# Altium PCB Power_9812282.PcbDoc
Units mm, origin at the board's own origin, x right, y up, seen from the top; angles counter-clockwise.
Board outline 64.01 x 76.07 mm, 2 copper layers (Top Layer, Bottom Layer); 36 components, 39 nets, 161 pads, 10 vias.
Unrouted connection lines stored in the file: 1.
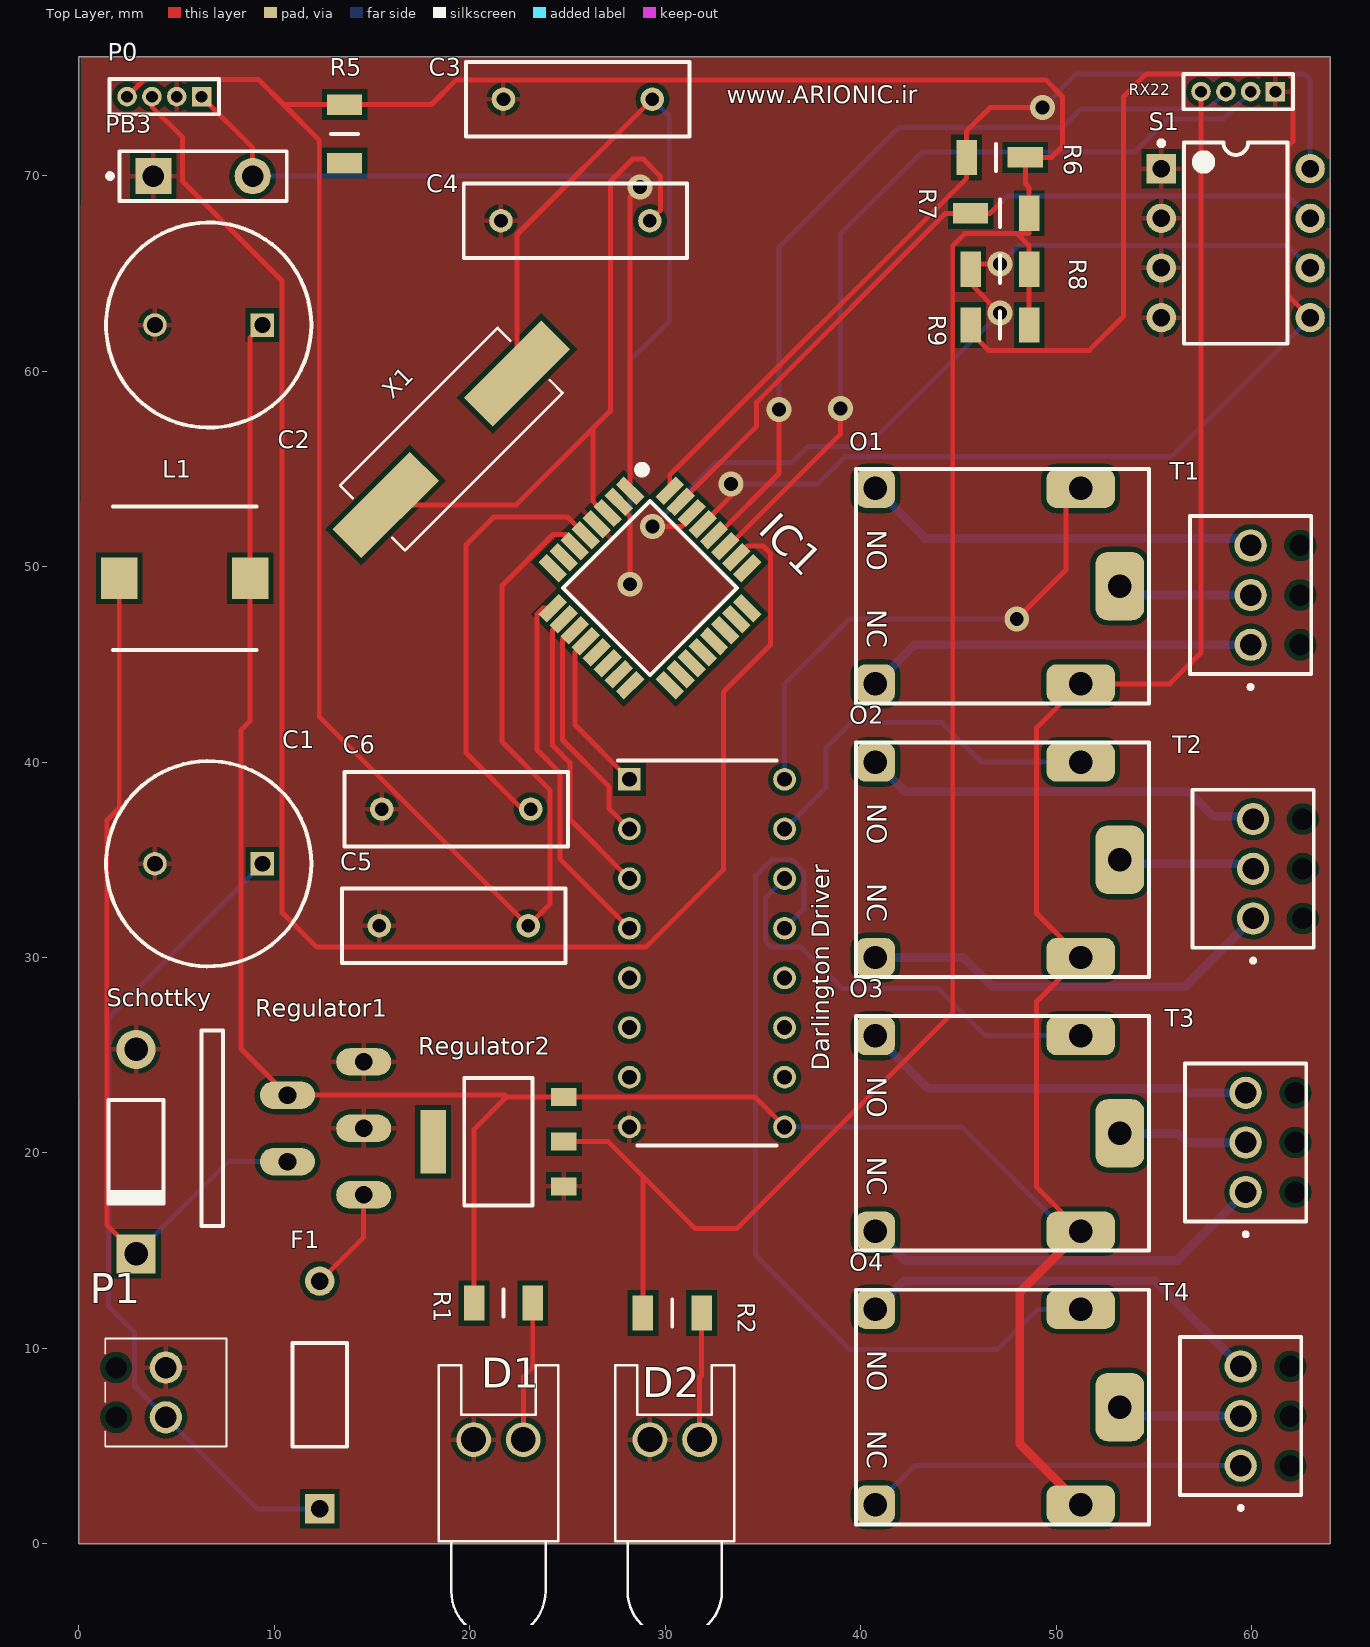
[diagram p0: Top Layer view]
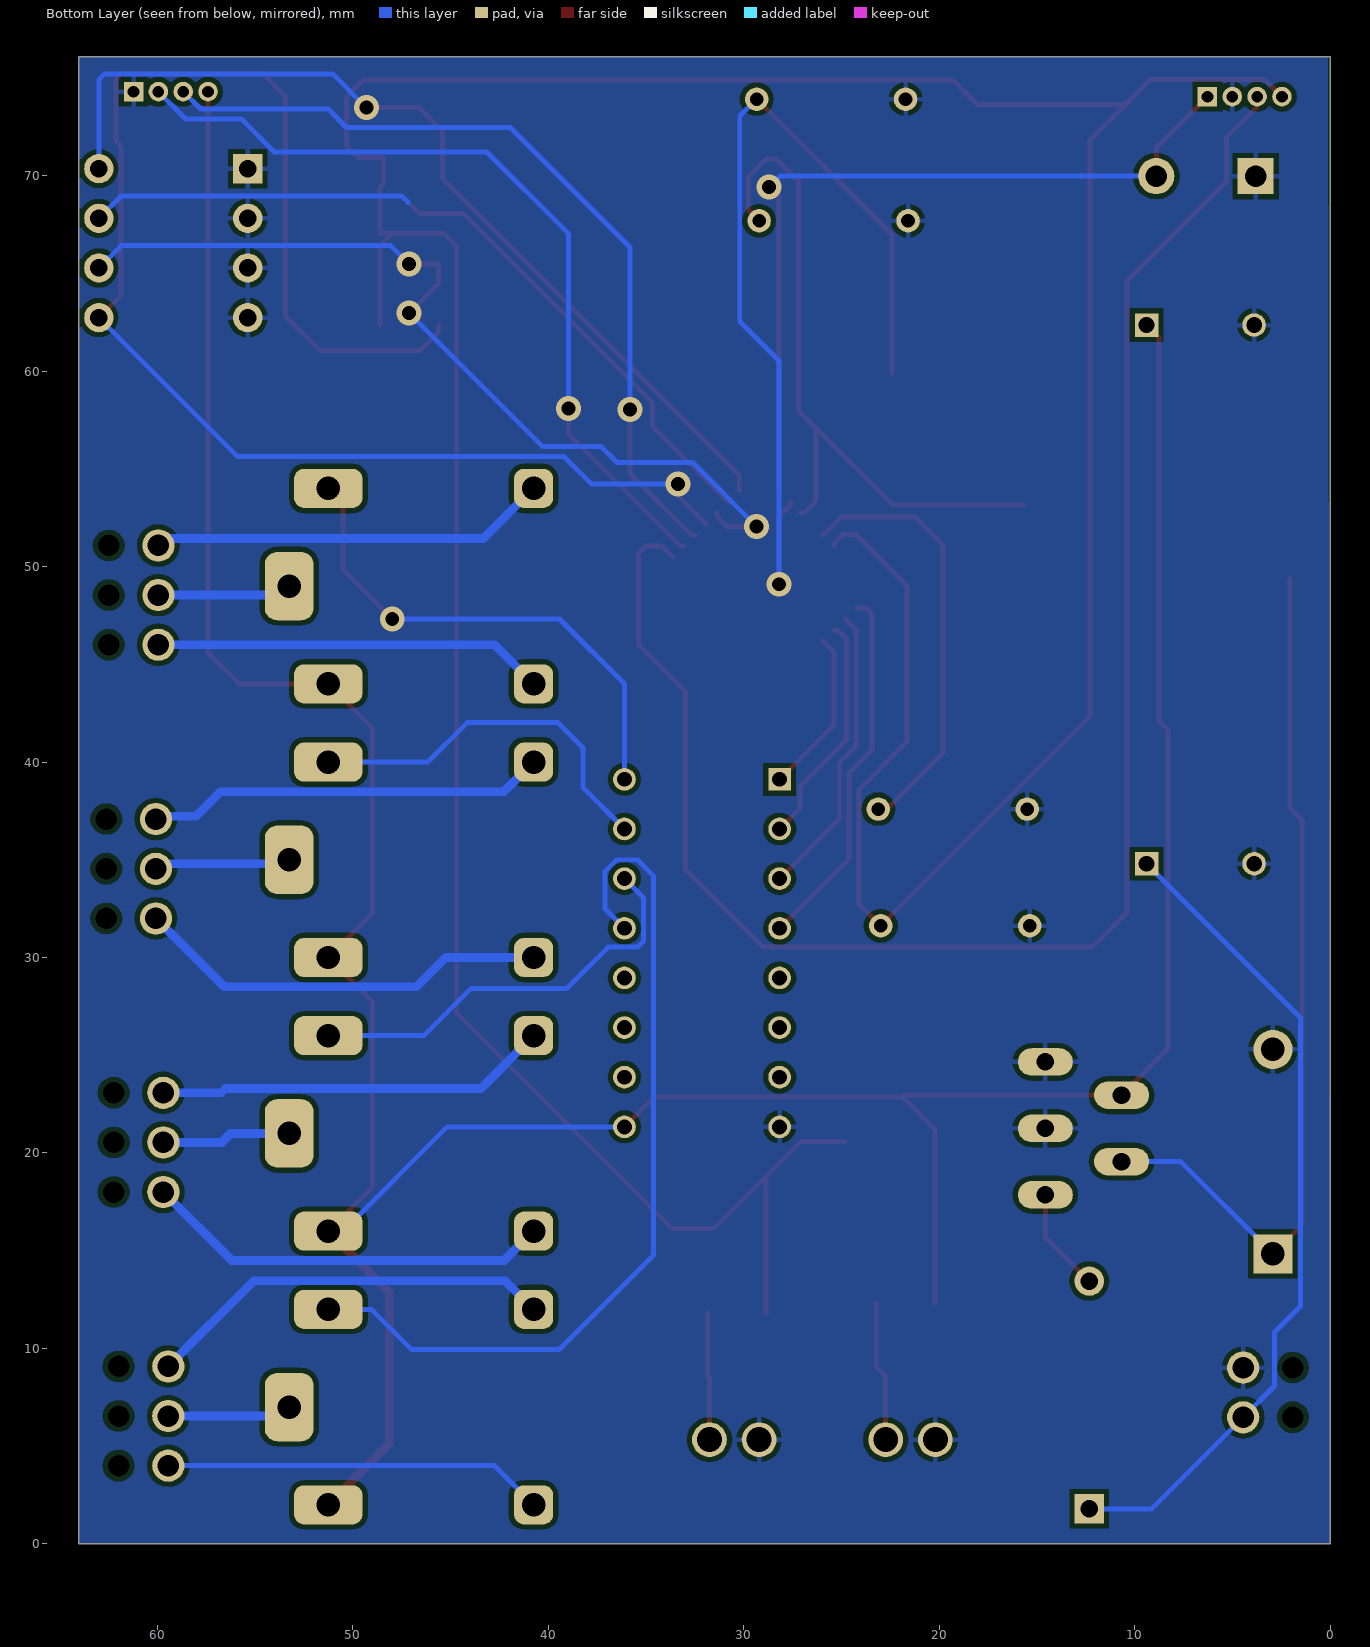
[diagram p1: Bottom Layer view, seen from below]
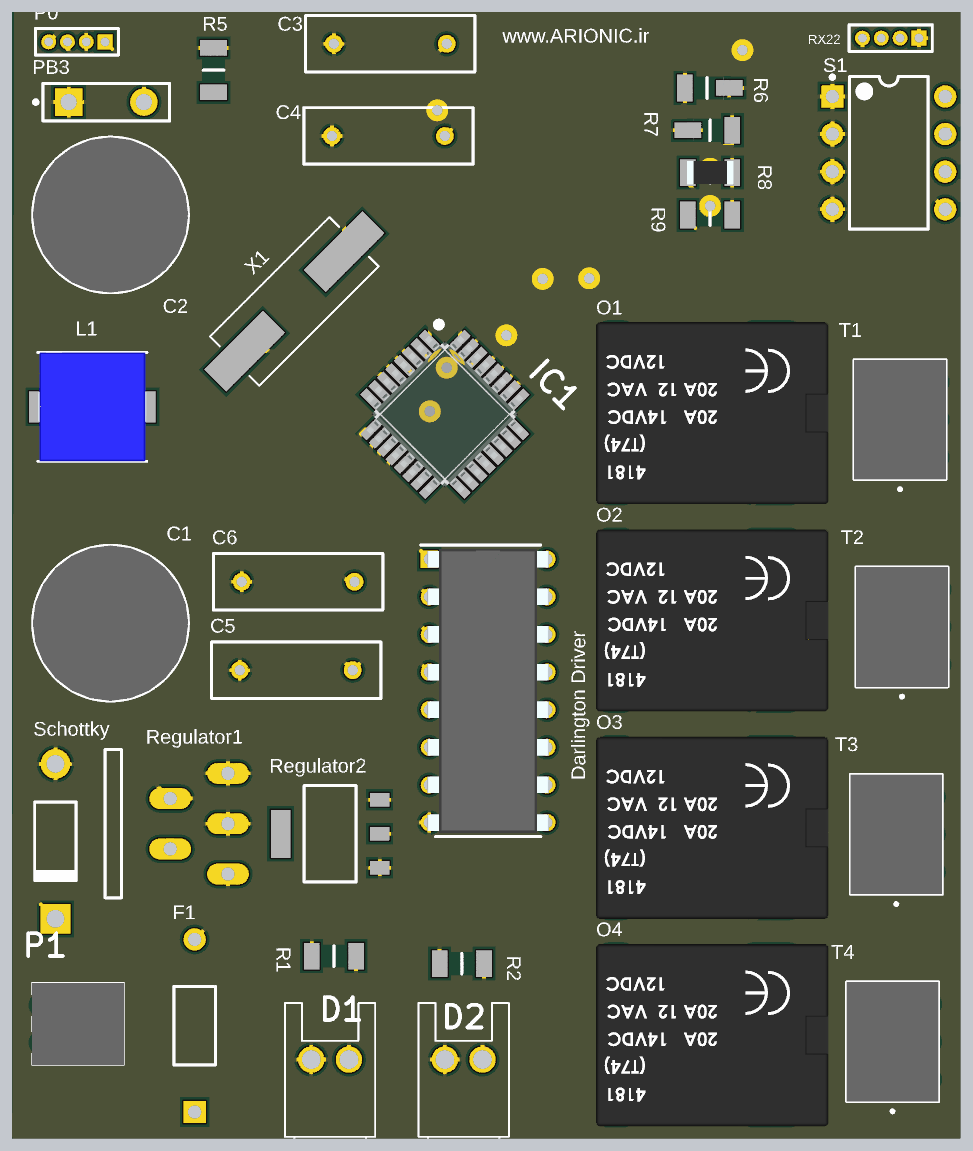
[diagram p2: 3D render of the assembled board from above, using the file's embedded part models]

## Layer stack, top to bottom
Top Solder: solder mask 0.0102, Solder Resist, Dk 3.5
Top Layer: signal copper 0.0356
Dielectric 1: dielectric 0.32, FR-4, Dk 4.8
Bottom Layer: signal copper 0.0356
Bottom Solder: solder mask 0.0102, Solder Resist, Dk 3.5

## Board outline
0,76.073 64.008,76.073 64.008,0 0,0
cut-out: 42.291,94.361

## Design rules (kind name [scope] priority, off if disabled: settings)
Clearance Clearance_1 [All] p1: gap=0.254 ignorepadtopadclearanceinfootprint=FALSE except(0: Arc-Hole Track-Hole SMDPad-Hole THPad-Hole Via-Hole Fill-Hole Poly-Hole Region-Hole Text-Hole)
Clearance [All] p2: gap=0.3 ignorepadtopadclearanceinfootprint=FALSE
PolygonConnect [All] p1: connectstyle=Relief reliefconductorwidth=0.254 reliefentries=4 polygonreliefangle="90 Angle" airgapwidth=0.254
RoutingVias [All] p1: holewidth=0.711 width=1.27 viastyle="Through Hole" minholewidth=0.711 minwidth=1.27 maxholewidth=0.711 maxwidth=1.27
SolderMaskExpansion [All] p1: expansion=0.102
Width Width_Relay_01 [InNet('NetO1_NC')] p1: maxlimit=0.45 minlimit=0.35 preferedwidth=0.4
Width [All] p2: maxlimit=0.254 minlimit=0.254 preferedwidth=0.254
30 further rules are at their usual default settings.

## Components (designator, comment, footprint, x,y, rotation, side; value= is the part's Value field where it differs from the comment)
C1 "100uF" CAPPRD550W60D1050H2150 9.388,34.798 r180 top
C2 "1000uF" CAPPRD550W60D1050H2150 9.388,62.357 r180 top
C3 "Cap" RAD-0.3 25.527,73.914 r0 top value=20pF
C4 "Cap" RAD-0.3 25.4,67.691 r0 top value=20pF
C5 "Cap" RAD-0.3 19.177,31.623 r180 top value=10pF
C6 "Cap" RAD-0.3 19.304,37.592 r180 top
D1 "LED0" LED-0 21.463,5.334 r0 top
D2 "LED0" LED-0 30.48,5.334 r0 top
"Darlington Driver" "ULN2003A" DIP794W56P254L1918H533Q16N 32.131,30.226 r0 top
F1 "Fuse 1" PIN-W2/E2.8 12.319,7.62 r90 top
IC1 "STM8S903K3T6C" QFP80P900X900X160-32N 29.21,48.895 r315 top
L1 "B82472P6152M000" INDPM7474X450N 5.413,49.403 r0 top
O1 "12V SMALL" Relay_5_Small 47,49 r270 top
O2 "12V SMALL" Relay_5_Small 47,35 r270 top
O3 "12V SMALL" Relay_5_Small 47,21 r270 top
O4 "12V SMALL" Relay_5_Small 47,7 r270 top
P0 "MHDR1X4" MHDR1X4 6.272,74.041 r180 top
P1 "INPUT_24V" 1725656 1.345,7.747 r270 top
PB3 "SW-PB" SPST-2 6.35,69.977 r0 top
R1 "1K" RESC3216X60N#1 21.717,12.319 r0 top
R2 "1k" RESC3216X60N#1 30.353,11.811 r0 top
R5 "CRCW120610M0FKEA" RESC3216X60N#1 13.589,72.136 r270 top
R6 "CRCW120610M0FKEA" RESC3216X60N#2 46.915,70.931 r0 top
R7 "CRCW120610M0FKEA" RESC3216X60N#3 47.117,68.073 r0 top
R8 "CRCW120610M0FKEA" RESC3216X60N#1 47.117,65.215 r0 top
R9 "CRCW120610M0FKEA" RESC3216X60N#1 47.117,62.357 r0 top
Regulator1 "LM2576" TO220-5 6.168,21.258 r90 top
Regulator2 "AMS1117-3.3" SOT229P700X180-4N 21.463,20.574 r90 top
RX22 "MHDR1X4" MHDR1X4 61.214,74.295 r180 top
S1 "SW-DIP4" DIP-8 59.182,66.548 r0 top
Schottky "1N5822" DO-41 2.921,20.066 r270 top
T1 "1725669" 1725669 59.944,46 r90 top
T2 "1725669" 1725669 60.071,32 r90 top
T3 "1725669" 1725669 59.69,18 r90 top
T4 "1725669" 1725669 59.436,4 r90 top
X1 "8.000MHZ" XTAL_ABLS-8.000MHZ-B2-T 19.05,56.515 r45 top

## Footprints (in the part's own frame and the unit in brackets; to place one, negate y for a bottom-side part, rotate by r counter-clockwise, add the part's x,y. Pads: shape width x height; smd on the part's side, far side on the other; paste and mask are expansions set on the pad)
1725656 [mm]
  round 1.65 hole 1.1: 1(-1.27,3.1) 2(1.27,3.1)
  round 0.55 hole 1.1 unplated: 3(-1.27,0.56) 4(1.27,0.56)
  silkscreen extent -2.77,0 2.77,6.2, body extent -2.77,0 2.77,6.2, height 8
1725669 [mm]
  round 1.65 hole 1.1: 1(0,0) 2(2.54,0) 3(5.08,0)
  round 0.55 hole 1.1 unplated: 4(0,-2.54) 5(2.54,-2.54) 6(5.08,-2.54)
  silkscreen extent -2.26,-3.1 6.58,3.1, body extent -1.5,-3.1 6.58,3.1, height 8.5
CAPPRD550W60D1050H2150 [mm]
  rect 1.2x1.2 hole 0.8: 1(0,0)
  round 1.2 hole 0.8: 2(5.5,0)
  silkscreen extent -2.5,-5.25 8,5.25, body extent -2.5,-5.25 8,5.25, height 21.5
DIP794W56P254L1918H533Q16N [mm]
  rect 1.16x1.16 hole 0.76: 1(-3.97,8.89)
  round 1.16 hole 0.76: 2(-3.97,6.35) 3(-3.97,3.81) 4(-3.97,1.27) 5(-3.97,-1.27) 6(-3.97,-3.81) 7(-3.97,-6.35) 8(-3.97,-8.89) 9(3.97,-8.89) 10(3.97,-6.35) 11(3.97,-3.81) 12(3.97,-1.27) 13(3.97,1.27) 14(3.97,3.81) 15(3.97,6.35) 16(3.97,8.89)
  silkscreen extent -4.55,-9.84 3.55,9.84, body extent -4.11,-9.59 4.11,9.59, height 5.33
DIP-8 [mm] "DIP; 8 Leads; Row Spacing 7.62 mm; Pitch 2.54 mm"
  rect 1.5x1.5 hole 0.9: 1(-3.81,3.81)
  round 1.5 hole 0.9: 2(-3.81,1.27) 3(-3.81,-1.27) 4(-3.81,-3.81) 5(3.81,-3.81) 6(3.81,-1.27) 7(3.81,1.27) 8(3.81,3.81)
  silkscreen extent -3.93,-5.15 2.65,5.23, body extent -3.6,-5.15 3.6,5.15, height 5.08
DO-41 [mm] "Diode, Axial; Body 5.2 x 2.7 mm (LxDia. max), Lead Dia. 0.86 mm (max)"
  round 2 hole 1.2: 1(-5.23,0)
  rect 2x2 hole 1.2: 2(5.23,0)
  silkscreen extent -2.65,-1.4 2.75,1.4
INDPM7474X450N [mm]
  rect 1.85x2.1 smd: 1(-3.35,0) 2(3.35,0)
  silkscreen extent -3.67,-3.67 3.68,3.68, body extent -3.67,-3.67 3.67,3.67, height 4.5
LED-0 [mil] "LED; 2 Leads"
  round 70 hole 50: 1(50,0) 2(-50,0)
  silkscreen extent -120,-400 120,150
MHDR1X4 [mm] "Connector; Header; 4 Position"
  rect 1x1 hole 0.6: 1(0,0)
  round 1 hole 0.6: 2(1.27,0) 3(2.54,0) 4(3.81,0)
  silkscreen extent -0.9,-0.9 4.71,0.9
PIN-W2/E2.8 [mm] "Thru-Hole; 2 Leads"
  rect 1.5x1.5 hole 0.9: 1(-5.825,0)
  round 1.5 hole 0.9: 2(5.825,0)
  silkscreen extent -2.65,-1.4 2.65,1.4
QFP80P900X900X160-32N [mm]
  rect 1.475x0.6 smd: 1(-4.238,2.8) 2(-4.238,2) 3(-4.238,1.2) 4(-4.238,0.4) 5(-4.238,-0.4) 6(-4.238,-1.2) 7(-4.238,-2) 8(-4.238,-2.8) 17(4.238,-2.8) 18(4.238,-2) 19(4.238,-1.2) 20(4.238,-0.4) 21(4.238,0.4) 22(4.238,1.2) 23(4.238,2) 24(4.238,2.8)
  rect 0.6x1.475 smd: 9(-2.8,-4.238) 10(-2,-4.238) 11(-1.2,-4.238) 12(-0.4,-4.238) 13(0.4,-4.238) 14(1.2,-4.238) 15(2,-4.238) 16(2.8,-4.238) 25(2.8,4.238) 26(2,4.238) 27(1.2,4.238) 28(0.4,4.238) 29(-0.4,4.238) 30(-1.2,4.238) 31(-2,4.238) 32(-2.8,4.238)
  silkscreen extent -4.77,-3.15 3.15,4.2, body extent -4.5,-4.5 4.5,4.5, height 1.6
RAD-0.3 [mm] "Radial Cap, Thru-Hole; 2 Leads; 0.3 in Pin Spacing"
  round 1.2 hole 0.7: 1(-3.81,0) 2(3.81,0)
  silkscreen extent -5.71,-1.91 5.71,1.91
Relay_5_Small [mm]
  rrect50% 2x3.5 hole 1.2: 1(5,4.25) 2(-5,4.25)
  rrect50% 3.5x2.5 hole 1.2: Com(0,6.25)
  rrect50% 2x2 hole 1.2: NC(5,-6.25) NO(-5,-6.25)
  silkscreen extent -6,-7.25 6,7.75, body extent -6.13,-7.58 6.17,8.12, height 13.71
RESC3216X60N#1 [mm]
  rect 1.05x1.8 smd: 1(-1.5,0) 2(1.5,0)
  silkscreen extent 0,-0.7 0,0.7, body extent -1.58,-0.8 1.58,0.8, height 0.6
RESC3216X60N#2 [mm]
  rect 1.05x1.8 smd: 1(-1.5,0)
  rect 1.8x1.05 smd: 2(1.5,0)
  silkscreen extent 0,-0.7 0,0.7, body extent -1.58,-0.8 1.58,0.8, height 0.6
RESC3216X60N#3 [mm]
  rect 1.8x1.05 smd: 1(-1.5,0)
  rect 1.05x1.8 smd: 2(1.5,0)
  silkscreen extent 0,-0.7 0,0.7, body extent -1.58,-0.8 1.58,0.8, height 0.6
SOT229P700X180-4N [mm]
  rect 0.93x1.31 smd: 1(-2.285,-3.345) 2(0.005,-3.345) 3(2.295,-3.345)
  rect 3.24x1.31 smd: 4(0.005,3.345)
  silkscreen extent -3.25,-1.75 3.25,1.75
SPST-2 [mm] "Switch; 2 Leads"
  rect 1.85x1.85 hole 1.1: 1(-2.54,0)
  round 1.85 hole 1.1: 2(2.54,0)
  silkscreen extent -4.89,-1.27 4.28,1.27
TO220-5 [mm]
  oval 1.408x2.816 hole 0.9: 1(-3.4,-8.4) 2(-1.7,-4.5) 3(0,-8.4) 4(1.7,-4.5) 5(3.4,-8.4)
  silkscreen extent -5,-1.2 5,-0.1
XTAL_ABLS-8.000MHZ-B2-T [mm]
  rect 5.6x2.1 smd: 1(-4.75,0) 2(4.75,0)
  silkscreen extent -5.7,-2.35 5.7,2.35

## Part data
C1 C2: library part 108CKE025M, "Capacitor Polarised", Manufacturer_Name=Cinch, Datasheet Link=https://componentsearchengine.com/Datasheets/2/108CKE025M.pdf, Height=21.5mm, Manufacturer_Part_Number=108CKE025M
C3 C4 C5 C6: "Capacitor", LatestRevisionDate=17-Jul-2002, LatestRevisionNote="Re-released for DXP Platform.", PackageDescription="Radial Cap, Thru-Hole; 2 Leads; 0.3 in Pin Spacing", PackageReference=RAD-0.3, Published=8-Jun-2000, Publisher="Altium Limited"
D1 D2: "Typical INFRARED GaAs LED", LatestRevisionDate=08-Jul-2005, LatestRevisionNote="Mech Layer 1 removed.", PackageDescription="LED; 2 Leads", PackageReference=LED-0, Published=8-Jun-2000, Publisher="Altium Limited"
"Darlington Driver": "Integrated Circuit", Manufacturer_Name=STMicroelectronics, Mouser Part Number=511-ULN2003A, RS Part Number=6868209, Allied_Number=70014189, Allied Price/Stock=http://www.alliedelec.com/stmicroelectronics-uln2003a/70014189/, Datasheet Link=http://www.st.com/web/en/resource/technical/document/datasheet/CD00001244.pdf, Height=5.33mm, Manufacturer_Part_Number=ULN2003A, Mouser Price/Stock=https://www.mouser.com/Search/Refine.aspx?Keyword=511-ULN2003A, RS Price/Stock=http://uk.rs-online.com/web/p/products/6868209
F1: "Fuse", LatestRevisionDate=17-Jul-2002, LatestRevisionNote="Re-released for DXP Platform.", PackageDescription="Thru-Hole; 2 Leads", PackageReference=PIN-W2/E2.8, Published=8-Jun-2000, Publisher="Altium Limited"
IC1: "Integrated Circuit", Manufacturer_Name=STMicroelectronics, Mouser Part Number=511-STM8S903K3T6C, RS Part Number=7250025P, Allied_Number=70391238, Allied Price/Stock=http://www.alliedelec.com/stmicroelectronics-stm8s903k3t6c/70391238/, Datasheet Link=http://www.st.com/st-web-ui/static/active/en/resource/technical/document/datasheet/CD00231332.pdf, Height=1.6mm, Manufacturer_Part_Number=STM8S903K3T6C, Mouser Price/Stock=https://www.mouser.com/Search/Refine.aspx?Keyword=511-STM8S903K3T6C, RS Price/Stock=http://china.rs-online.com/web/p/products/7250025P
L1: "Inductor", Manufacturer_Name=EPCOS, Mouser Part Number=871-B82472P6152M000, Datasheet Link=https://www.tdk-electronics.tdk.com/inf/30/db/ind_2008/b82472p6.pdf, Height=4.5mm, Manufacturer_Part_Number=B82472P6152M000, Mouser Price/Stock=https://www.mouser.com/Search/Refine.aspx?Keyword=871-B82472P6152M000
O1: library part HJR-78F-12VDC-S-Z, Case/Package=LQFP, Frequency=16MHz, Manufacturer=TIANBO, Manufacturer Part Number=STM8S003K3T6C, Max Operating Temperature=85°C, Max Power Dissipation=330mW, Max Supply Voltage=5.5V, Min Operating Temperature=-40°C, Min Supply Voltage=2.95V, Operating Temp="-40°C to +85°C", Package Quantity=250, Rating="7A, 120VAC", Storage Temp="-40°C to +105°C", ComponentLink2Description=http://www.st.com/web/en/resource/technical/document/datasheet/DM00024550.pdf?src-supplier=Future+Electronics, ComponentLink2URL=http://www.st.com/web/en/resource/technical/document/datasheet/DM00024550.pdf?src-supplier=Future+Electronics, ComponentLink3Description=http://www.st.com/web/en/resource/technical/document/datasheet/DM00024550.pdf?src-supplier=Avnet+Europe, ComponentLink3URL=http://www.st.com/web/en/resource/technical/document/datasheet/DM00024550.pdf?src-supplier=Avnet+Europe, ComponentLink4Description=http://www.st.com/web/en/resource/technical/document/datasheet/DM00024550.pdf?src-supplier=Mouser, ComponentLink4URL=http://www.st.com/web/en/resource/technical/document/datasheet/DM00024550.pdf?src-supplier=Mouser, Data Bus Width=8b, Data Rate=8Mbps, Height=1.45mm, Interface=I2C,SPI,IrDA,UART,USART,LIN, Lead Free="Lead Free", Length=7.2mm, Manufacture Part #=HJR-78F-12VDC-S-Z, Max Frequency=16MHz, Memory Size=8KB, Memory Type=FLASH, Mount="Surface Mount", Number of ADC Channels=5, Number of I2C Channels=1, Number of I/Os=28, Number of Pins=32, Number of Programmable I/O=28, Number of SPI Channels=1, Number of Timers/Counters=7, Number of UART Channels=1, Oscillator Type=Internal, Packaging=Tray, Peripherals="Brown-out Detect/Reset,POR,PWM,WDT,I2C", Radiation Hardening=No, RAM Size=1KB, REACH SVHC="No SVHC", Stock 1=0, Supplier 1="Future Electronics", Watchdog Timer=Yes, Width=7.2mm
O2 O3 O4: library part HJR-78F-12VDC-S-Z, Manufacturer=TIANBO, Operating Temp="-40°C to +85°C", Rating="7A, 120VAC", Storage Temp="-40°C to +105°C", Manufacture Part #=HJR-78F-12VDC-S-Z
P0 RX22: "Header, 4-Pin", LatestRevisionDate=17-Jul-2002, LatestRevisionNote="Re-released for DXP Platform.", Publisher="Altium Limited"
P1: library part 1725656, "Connector", Manufacturer_Name="Phoenix Contact", Mouser Part Number=651-1725656, RS Part Number=3909023, Allied_Number=70054335, Allied Price/Stock=http://www.alliedelec.com/phoenix-contact-1725656/70054335/, Datasheet Link=https://www.phoenixcontact.com/online/portal/gb?uri=pxc-oc-itemdetail:pid=1725656&library=gben&tab=1, Height=8mm, Manufacturer_Part_Number=1725656, Mouser Price/Stock=https://www.mouser.com/Search/Refine.aspx?Keyword=651-1725656, RS Price/Stock=https://uk.rs-online.com/web/p/products/3909023
PB3: "Switch", LatestRevisionDate=17-Jul-2002, LatestRevisionNote="Re-released for DXP Platform.", PackageDescription="Switch; 2 Leads", PackageReference=SPST-2, Published=24-Mar-1999, Publisher="Altium Limited"
R1 R2: library part CRCW120610M0FKEA, "Resistor", Manufacturer_Name=Vishay, Mouser Part Number=71-CRCW1206-10M-E3, Allied_Number=70204450, Allied Price/Stock=https://www.alliedelec.com/vishay-dale-crcw120610m0fkea/70204450/, Height=0.6mm, Manufacturer_Part_Number=CRCW120610M0FKEA, Mouser Price/Stock=https://www.mouser.com/Search/Refine.aspx?Keyword=71-CRCW1206-10M-E3
R5 R6 R7 R8 R9: "Resistor", Manufacturer_Name=Vishay, Mouser Part Number=71-CRCW1206-10M-E3, Allied_Number=70204450, Allied Price/Stock=https://www.alliedelec.com/vishay-dale-crcw120610m0fkea/70204450/, Height=0.6mm, Manufacturer_Part_Number=CRCW120610M0FKEA, Mouser Price/Stock=https://www.mouser.com/Search/Refine.aspx?Keyword=71-CRCW1206-10M-E3
Regulator1: "Buck Switching Regulator IC Positive Fixed 5V 1 Output 3A TO-263-6, D²Pak _5 Leads + Tab_, TO-263BA", Package="TO-263-6 National Semiconductor", Availability=Unavailable, MF="Texas Instruments", MP=LM2576, Price=None, SnapEDA_Link=https://www.snapeda.com/parts/LM2576/Texas%20Instruments/view-part/214937/?ref=snap
Regulator2: library part AMS1117, "Low-dropout regulator", Type=AMS1117-3.3
S1: "DIP Switch", LatestRevisionDate=17-Jul-2002, LatestRevisionNote="Re-released for DXP Platform.", PackageReference=DIP-8, Published=24-Mar-1999, Publisher="Altium Limited"
Schottky: library part "Diode 1N4001", "1 Amp General Purpose Rectifier", Code_JEDEC=DO-204-AL, ComponentLink1Description="Manufacturer Link", ComponentLink1URL=http://www.fairchildsemi.com/, ComponentLink2Description=Datasheet, ComponentLink2URL=http://www.fairchildsemi.com/ds/1N%2F1N4001.pdf, DatasheetVersion=1998, LatestRevisionDate=17-Jul-2002, LatestRevisionNote="Re-released for DXP Platform.", PackageDescription="Diode, Axial; Body 5.2 x 2.7 mm (LxDia. max), Lead Dia. 0.86 mm (max)", PackageReference=DO-41, PackageVersion=Aug-1999, Published=8-Jun-2000, Publisher="Altium Limited"
T1 T2 T3 T4: "Connector", Manufacturer_Name="Phoenix Contact", Mouser Part Number=651-1725669, RS Part Number=3909039, Allied_Number=70054336, Allied Price/Stock=http://www.alliedelec.com/phoenix-contact-1725669/70054336/, Datasheet Link=https://www.phoenixcontact.com/online/portal/gb?uri=pxc-oc-itemdetail:pid=1725669&library=gben&tab=1, Height=8.5mm, Manufacturer_Part_Number=1725669, Mouser Price/Stock=https://www.mouser.com/Search/Refine.aspx?Keyword=651-1725669, RS Price/Stock=https://uk.rs-online.com/web/p/products/3909039
X1: library part ABLS-8.000MHZ-B2-T, "8MHz ±20ppm Crystal 18pF 80 Ohms HC-49/US", Package="HC-49/US Abracon LLC", Availability=Unavailable, MF="Abracon LLC", MP=ABLS-8.000MHZ-B2, Price=None, SnapEDA_Link=https://www.snapeda.com/parts/ABLS-8.000MHZ-B2/Abracon%20LLC/view-part/2753215/?ref=snap

## Via types
v1: diameter 1.27, hole 0.711, Top Layer to Bottom Layer, 10 vias

## Nets (pads, with @x,y where several pads share a name; then routed paths per layer and width w, separated by ;. In a path a pad name is that pad's centre, name@x,y a point inside that pad or via, vN(x,y) a via of type N, cw(c..) or ccw(c..) an arc to the next point about the centre after c; other vN are vias at no path point)
3.3V: C5.1 IC1.6 P0.4 R2.1 R5.1 R6.2 R7.2 R8.2 R9.2 Regulator2.2 | length 211.2
  Top Layer w0.254: P0.4 3.351,74.93 9.169,74.93 10.463,73.636 ; Regulator2.2 27.076,20.579 28.853,18.802 ; IC1.6 25.365,51.191 24.917,51.638 24.257,51.638 21.641,49.022 21.641,41.037 24.095,38.583 24.095,32.731 C5.1 12.294,42.316 12.294,71.806 10.463,73.636 ; R2.1 28.853,18.802 ; R9.2 R8.2 48.617,66.421 48.007,67.031 ; 10.463,73.636 R5.1 18.034,73.636 19.303,74.905 49.454,74.905 50.317,74.041 50.317,71.501 49.747,70.931 R6.2 48.415,69.594 48.617,69.393 R7.2 48.617,67.031 48.007,67.031 ; 28.853,18.802 31.526,16.129 33.655,16.129 44.704,27.178 44.704,66.421 45.314,67.031 48.007,67.031
5V: "Darlington Driver.9" C2.1 L1.2 O1.1 O2.1 O3.1 O4.1 R1.1 Regulator1.4 Regulator2.3 RX22.4 | length 179.4
  Top Layer w0.254: C2.1 8.763,61.732 L1.2 8.763,42.113 8.28,41.631 8.28,25.346 Regulator1.4 21.788,22.958 21.877,22.869 ; R1.1 20.217,21.209 21.877,22.869 ; 36.101,21.336 34.568,22.869 Regulator2.3 21.877,22.869 ; O3.1 48.997,18.253 48.997,27.747 O2.1 48.997,32.253 48.997,41.747 O1.1 55.811,44 57.404,45.593 RX22.4
  Top Layer w0.45: O4.1 48.133,5.117 48.133,12.883 O3.1
  Bottom Layer w0.254: 36.101,21.336 45.159,21.336 50.495,16 O3.1
24V: C1.1 F1.1 P1.2 | length 42.6
  Bottom Layer w0.254: C1.1 1.524,26.934 1.524,12.141 2.845,10.82 2.845,8.077 P1.2 9.127,1.795 F1.1
DATA1: IC1.28 RX22.3 | length 42.4
  Top Layer w0.254: IC1.28 32.658,51.609 35.814,54.765 v1(35.814,58.039)
  Bottom Layer w0.254: v1(35.814,58.039) 35.814,66.345 41.935,72.466 50.317,72.466 51.265,73.414 57.793,73.414 RX22.3
DATA2: IC1.27 RX22.2 | length 42.5
  Top Layer w0.254: IC1.27 33.223,51.043 38.954,56.773 v1(38.954,58.08)
  Bottom Layer w0.254: v1(38.954,58.08) 38.954,67.021 43.155,71.222 54.026,71.222 55.71,72.906 58.555,72.906 RX22.2
GND: "Darlington Driver.8" C1.2 C2.2 C3.1 C4.1 C5.2 C6.2 D1.2 D2.2 IC1.4 P0.2 P1.1 PB3.1 Regulator1.3 Regulator1.5 Regulator2.1 RX22.1 S1.1 S1.2 S1.3 S1.4 Schottky.1
NetC3_2: C3.2 IC1.2 X1.2 | length 47.4
  Top Layer w0.254: X1.2 22.409,66.986 C3.2 ; IC1.2 27.627,53.138 28.194,52.571 v1(28.194,49.098)
  Bottom Layer w0.254: v1(28.194,49.098) 28.194,60.528 30.201,62.535 30.201,73.05 C3.2
NetC4_2: C4.2 IC1.3 X1.1 | length 35.9
  Top Layer w0.254: X1.1 22.377,53.156 26.289,57.068 ; IC1.3 26.894,52.74 26.289,53.345 26.289,57.068 ; C4.2 29.743,68.224 29.743,69.977 28.88,70.841 28.321,70.841 27.203,69.723 27.203,57.982 26.289,57.068
NetC6_1: C6.1 IC1.5 | length 22.2
  Top Layer w0.254: C6.1 22.682,37.592 19.812,40.462 19.812,51.13 21.209,52.527 25.012,52.527 IC1.5
NetD1_1: D1.1 R1.2 | length 7.2
  Top Layer w0.254: D1.1 22.733,8.56 23.217,9.044 R1.2
NetD2_1: D2.1 R2.2 | length 6.5
  Top Layer w0.254: D2.1 31.75,8.509 31.853,8.612 R2.2
"NetDarlington Driver_13": "Darlington Driver.13" O4.2 | length 45.3
  Bottom Layer w0.254: 36.101,31.496 37.084,32.479 37.084,34.417 36.5,35.001 35.433,35.001 34.62,34.188 34.62,14.757 39.421,9.957 47.004,9.957 49.047,12 O4.2
"NetDarlington Driver_14": "Darlington Driver.14" O3.2 | length 21.7
  Bottom Layer w0.254: 36.101,34.036 35.128,33.063 35.128,30.836 35.433,30.531 36.932,30.531 39.04,28.423 43.942,28.423 46.365,26 O3.2
"NetDarlington Driver_15": "Darlington Driver.15" O2.2 | length 19.4
  Bottom Layer w0.254: 36.101,36.576 38.227,38.702 38.227,40.742 39.497,42.012 44.145,42.012 46.157,40 O2.2
"NetDarlington Driver_16": "Darlington Driver.16" O1.2 | length 26.6
  Top Layer w0.254: v1(47.981,47.32) 50.495,49.835 50.495,54 O1.2
  Bottom Layer w0.254: 36.101,39.116 36.101,44 39.421,47.32 v1(47.981,47.32)
NetF1_2: F1.2 Regulator1.1 | length 5.3
  Top Layer w0.254: F1.2 14.568,15.694 Regulator1.1
NetL1_1: L1.1 Regulator1.2 Schottky.2 | length 45.2
  Top Layer w0.254: L1.1 2.063,37.648 1.422,37.008 1.422,16.335 Schottky.2
  Bottom Layer w0.254: Schottky.2 7.643,19.558 Regulator1.2
NetO1_COM: O1.Com T1.2 | length 6.9
  Bottom Layer w0.254: O1.Com O1.Com@53.71,48.54
  Bottom Layer w0.45: O1.Com@53.71,48.54 T1.2
NetO1_NC: O1.NC T1.1 | length 20
  Bottom Layer w0.45: O1.NC 42.75,46 T1.1
NetO1_NO: O1.NO T1.3 | length 20.4
  Bottom Layer w0.254: T1.3@59.589,51.435 T1.3
  Bottom Layer w0.45: O1.NO 43.315,51.435 T1.3@59.589,51.435
NetO2_COM: O2.Com T2.2 | length 7
  Bottom Layer w0.254: O2.Com O2.Com@53.452,34.798 ; T2.2@59.813,34.798 T2.2
  Bottom Layer w0.45: O2.Com@53.452,34.798 T2.2@59.813,34.798
NetO2_NC: O2.NC T2.1 | length 21.4
  Bottom Layer w0.45: O2.NC 45.237,30 46.739,28.499 56.57,28.499 T2.1
NetO2_NO: O2.NO T2.3 | length 20.5
  Bottom Layer w0.45: O2.NO 42.269,38.481 56.769,38.481 58.021,37.229 59.922,37.229 T2.3
NetO3_COM: O3.Com T3.2 | length 6.6
  Bottom Layer w0.45: O3.Com 56.236,21 56.696,20.54 T3.2
NetO3_NC: O3.NC T3.1 | length 21
  Bottom Layer w0.45: O3.NC 42.247,14.503 56.193,14.503 T3.1
NetO3_NO: O3.NO T3.3 | length 20.1
  Bottom Layer w0.254: 56.515,23.292 56.727,23.08
  Bottom Layer w0.45: O3.NO 43.458,23.292 56.515,23.292 ; 56.727,23.08 T3.3
NetO4_COM: O4.Com T4.2 | length 6.4
  Top Layer w0.254: O4.Com O4.Com@53.71,6.54
  Bottom Layer w0.45: O4.Com@53.71,6.54 T4.2
NetO4_NC: O4.NC T4.1 | length 19.5
  Bottom Layer w0.254: O4.NC 42.75,4 T4.1
NetO4_NO: O4.NO T4.3 | length 21.1
  Bottom Layer w0.45: O4.NO 42.212,13.462 55.054,13.462 T4.3
NRST: IC1.1 P0.1 PB3.2 | length 40.9
  Top Layer w0.254: P0.1 8.89,71.423 PB3.2 ; IC1.1 28.193,68.911 v1(28.701,69.419)
  Bottom Layer w0.254: PB3.2 28.143,69.977 v1(28.701,69.419)
PD4: IC1.29 R9.1 S1.5 | length 78.4
  Top Layer w0.254: IC1.29 33.364,53.615 v1(33.364,54.229) ; R9.1 45.617,61.976 46.531,61.062 51.689,61.062 53.442,62.814 53.442,74.041 54.61,75.209 61.849,75.209 62.103,74.955 62.103,71.755 61.849,71.501 61.849,63.881 S1.5
  Bottom Layer w0.254: v1(33.364,54.229) 37.795,54.229 39.192,55.626 55.88,55.626 S1.5
PD5: IC1.30 R8.1 S1.6 | length 46.1
  Top Layer w0.254: v1(29.337,52.045) 30.831,52.045 31.358,52.572 IC1.30 ; v1(47.117,62.967) 45.617,64.467 R8.1 45.617,65.481 v1(47.117,65.481)
  Bottom Layer w0.254: v1(29.337,52.045) 32.614,55.321 36.469,55.321 37.283,56.135 40.286,56.135 v1(47.117,62.967) ; v1(47.117,65.481) 48.057,66.421 61.849,66.421 S1.6
PD6: IC1.31 R7.1 S1.7 | length 39.9
  Top Layer w0.254: IC1.31 34.672,57.185 34.672,58.412 44.333,68.073 R7.1 46.609,68.073 47.168,68.632
  Bottom Layer w0.254: 47.168,68.632 47.497,68.961 61.849,68.961 S1.7
PD7: IC1.32 R6.1 S1.8 | length 48.2
  Top Layer w0.254: IC1.32 30.227,54.687 45.415,69.875 R6.1 45.415,72.289 46.609,73.482 v1(49.301,73.482)
  Bottom Layer w0.254: v1(49.301,73.482) 51.029,75.209 62.687,75.209 62.992,74.905 S1.8
RL1: "Darlington Driver.1" IC1.12 | length 8.4
  Top Layer w0.254: IC1.12 25.375,45.625 25.375,41.902 28.161,39.116
RL2: "Darlington Driver.2" IC1.11 | length 11.9
  Top Layer w0.254: IC1.11 25.197,46.747 24.74,46.29 24.74,41.129 27.127,38.741 27.127,37.61 28.161,36.576
RL3: "Darlington Driver.3" IC1.10 | length 15.1
  Top Layer w0.254: IC1.10 24.232,46.745 24.232,40.846 25.111,39.967 25.111,37.086 28.161,34.036
RL4: "Darlington Driver.4" IC1.9 | length 18.9
  Top Layer w0.254: IC1.9 23.749,47.878 23.445,47.574 23.445,40.616 24.603,39.459 24.603,35.054 28.161,31.496
SWIM: IC1.26 P0.3 | length 88.8
  Top Layer w0.254: P0.3 3.732,73.533 5.309,71.956 5.309,69.698 10.389,64.618 10.389,32.309 12.167,30.531 29.007,30.531 32.969,34.493 32.969,43.586 35.382,45.999 35.382,50.673 35.001,51.054 34.197,51.054 IC1.26
pads on no net: "Darlington Driver.5" "Darlington Driver.6" "Darlington Driver.7" "Darlington Driver.10" "Darlington Driver.11" "Darlington Driver.12" IC1.7 IC1.8 IC1.13 IC1.14 IC1.15 IC1.16 IC1.17 IC1.18 IC1.19 IC1.20 IC1.21 IC1.22 IC1.23 IC1.24 IC1.25 P1.3 P1.4 R5.2 Regulator2.4 T1.4 T1.5 T1.6 T2.4 T2.5 T2.6 T3.4 T3.5 T3.6 T4.4 T4.5 T4.6

## Polygon pours and split planes (outlines as drawn)
GND on Top Layer "Polygon_GND_Bottom" (solid, pour order 2): 0.127,76.073 64.008,76.073 64.008,0 0,0
GND on Bottom Layer "GND_L02_P004" (solid, pour order 4): 0.127,76.073 64.008,76.073 64.008,0 0,0

## Silkscreen, mask and mechanical layers (free items; w line width, h text height)
Top Overlay:
  text "www.ARIONIC.ir" at 33.147,73.406 h1.52

## Text inside footprints (layer, text, board x,y; h text height)
O1: Top Overlay "NO" at 40.32,51.896 h1 r270; Top Overlay "NC" at 40.32,47.806 h1 r270
O2: Top Overlay "NO" at 40.32,37.896 h1 r270; Top Overlay "NC" at 40.32,33.806 h1 r270
O3: Top Overlay "NO" at 40.32,23.896 h1 r270; Top Overlay "NC" at 40.32,19.806 h1 r270
O4: Top Overlay "NC" at 40.32,5.806 h1 r270; Top Overlay "NO" at 40.32,9.896 h1 r270